# Altium PCB TB Power supply pcb.PcbDoc
Units mm, origin at the board's own origin, x right, y up, seen from the top; angles counter-clockwise.
Board outline 82 x 53 mm, 2 copper layers (Top Layer, Bottom Layer); 21 components, 8 nets, 58 pads, 67 vias.
Unrouted connection lines stored in the file: 9.
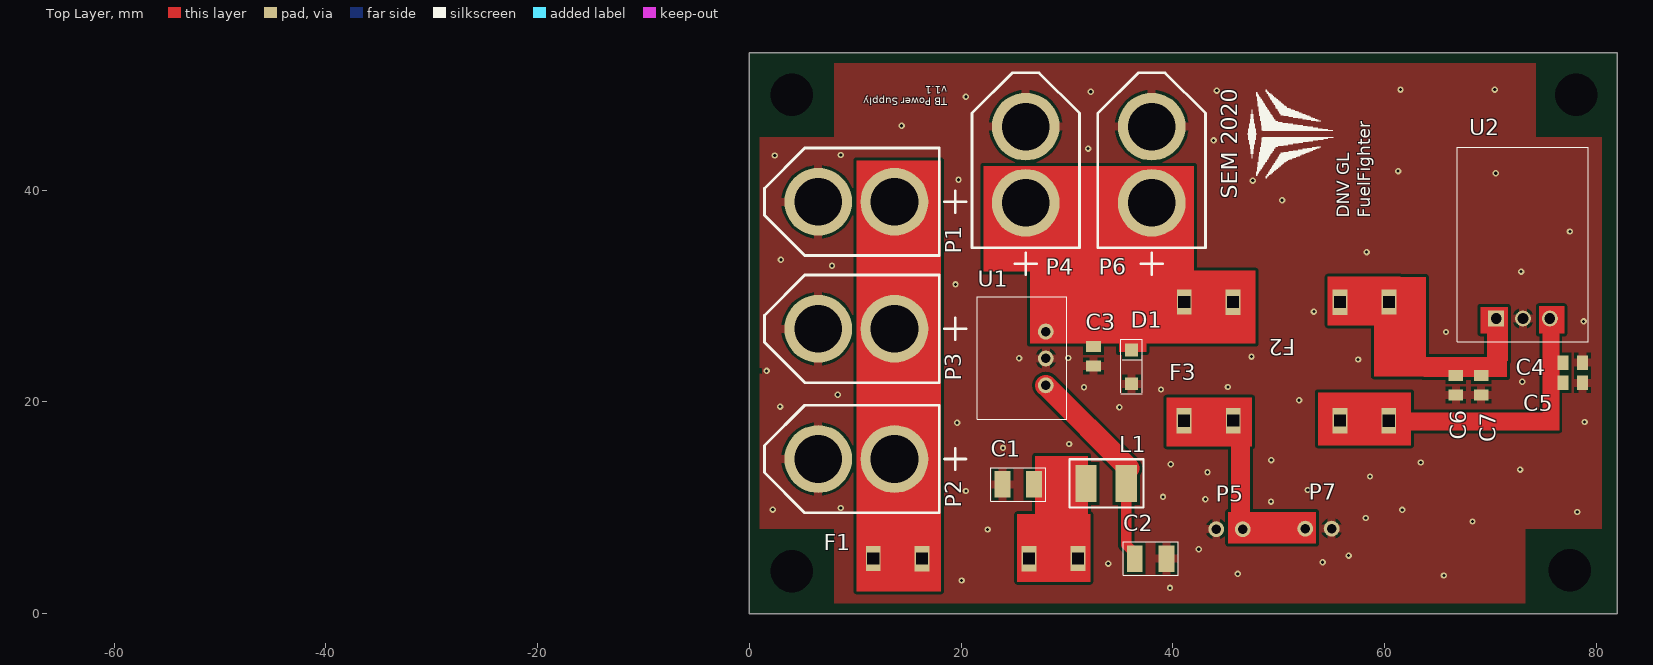
[diagram p0: Top Layer view]
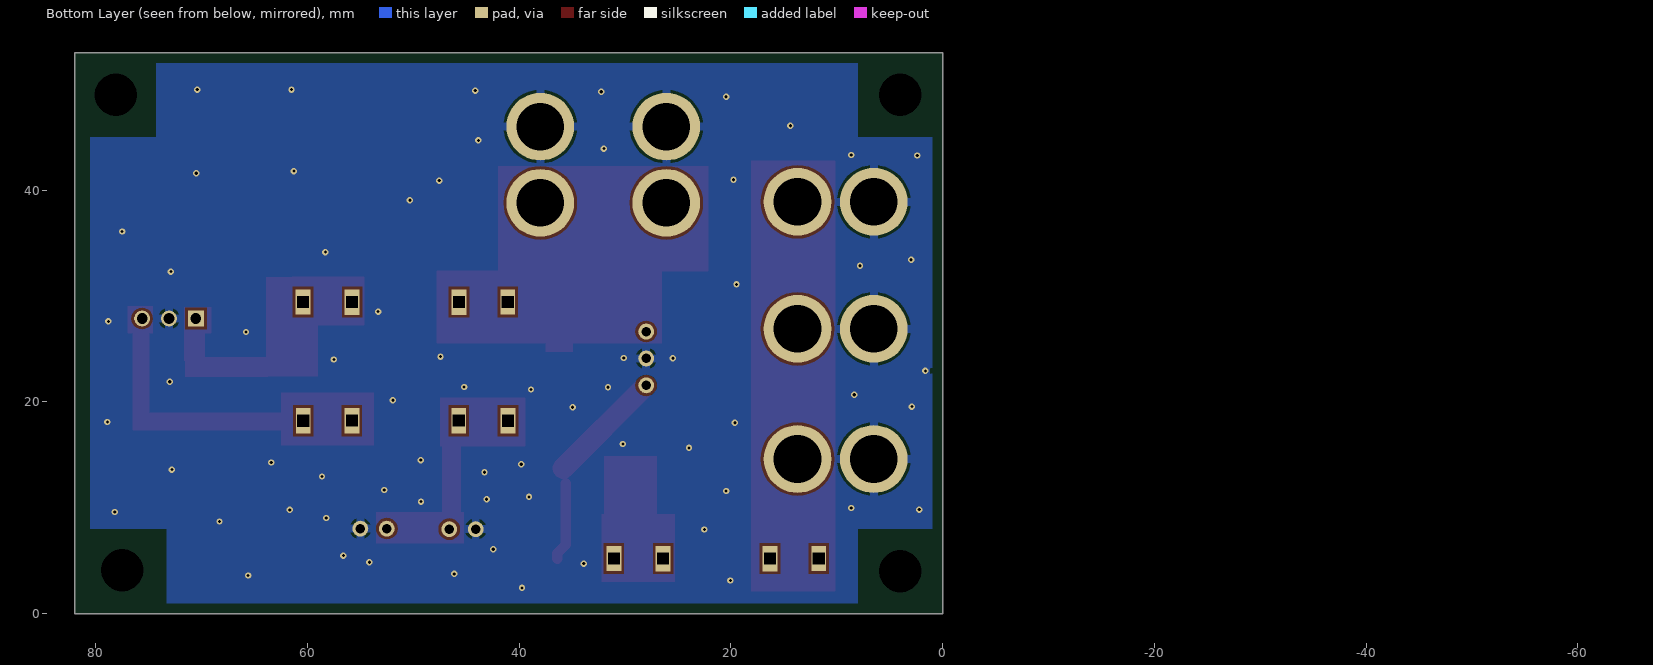
[diagram p1: Bottom Layer view, seen from below]

## Layer stack, top to bottom
Top Solder: solder mask 0.0102, Solder Resist, Dk 3.5
Top Layer: signal copper 0.0356
Dielectric 1: dielectric 0.32, FR-4, Dk 4.8
Bottom Layer: signal copper 0.0356
Bottom Solder: solder mask 0.0102, Solder Resist, Dk 3.5

## Board outline
0,53 0,0 82,0 82,53

## Design rules (kind name [scope] priority, off if disabled: settings)
Clearance [All] p1: gap=0.254 ignorepadtopadclearanceinfootprint=TRUE except(0: Arc-Text Track-Text SMDPad-Hole THPad-Hole Via-Hole Fill-Hole Poly-Hole Region-Hole Text-Text Text-Hole; 0.203: Arc-Arc Arc-Track Arc-SMDPad Arc-THPad Arc-Hole Track-Track Track-SMDPad Track-THPad Track-Hole SMDPad-SMDPad)
HoleSize [All] p1: absolutevalues=TRUE maxlimit=5 minlimit=0.025 maxpercent=80.000 minpercent=20.000
PlaneConnect [All] p1: planeconnectstyle=Relief reliefexpansion=0.508 reliefentries=4 reliefconductorwidth=0.5 reliefairgap=0.254
PolygonConnect [All] p1: connectstyle=Relief reliefconductorwidth=0.8 reliefentries=4 polygonreliefangle="90 Angle" airgapwidth=0.254
RoomDefinition "TB Power supply pcb" [InComponentClass('TB Power supply pcb')] p1: confinementstyle=ConfineIn formatcopy=TRUE lockcomponents=FALSE outline -2,-7.975 82.8,-7.975 82.8,54 -2,54
RoutingVias [All] p1: holewidth=0.711 width=1.27 viastyle="Through Hole" minholewidth=0.3 minwidth=0.6 maxholewidth=0.711 maxwidth=1.27
SolderMaskExpansion [All] p1: expansion=0.102 istentingtop=FALSE
Width [All] p1: maxlimit=4 minlimit=0.254 preferedwidth=0.4 minimp=50.000000 maximp=50.000000 favimp=50.000000
28 further rules are at their usual default settings.

## Components (designator, comment, footprint, x,y, rotation, side; value= is the part's Value field where it differs from the comment)
C1 "SMD" C_smd_3225 25.4,12.2 r180 top value="10 uF 63V"
C2 "SMD" C_smd_3225 37.9,5.2 r0 top value="10 uF 63V"
C3 "SMD" C_SMD_0805_pcb 32.5,24.3 r270 top value="10 uF 25V"
C4 "SMD" C_SMD_0805_pcb 77.775,23.7 r0 top value="10 uF 10V"
C5 "SMD" C_SMD_0805_pcb 77.775,21.8 r0 top value="10 uF 10V"
C6 "SMD" C_SMD_0805_pcb 66.725,21.575 r270 top value="10 uF 25V"
C7 "SMD" C_SMD_0805_pcb 69.125,21.575 r270 top value="10 uF 25V"
D1 "D_ZENER_smd_13V" D_ZENER_12V_smd 36.1,23.3 r90 top value="Zener 13V"
F1 "Fuse-holder-3A" fuse_holder_3A 32.55,2.325 r180 top value="1.5A Fuse"
F2 "Fuse-holder-3A" fuse_holder_3A 61.925,26.55 r180 top value="2A Fuse"
F3 "Fuse-holder-3A" fuse_holder_3A 39.55,21.1 r0 top
L1 "L_1.18A_4532" L_1.18A_4532 33.7,12.3 r0 top value="5.6 uH 1.18A"
P1 "XT-60" XT-60 6.5,38.9 r270 top
P2 "XT-60" XT-60 6.5,14.6 r270 top
P3 "XT-60" XT-60 6.5,26.9 r270 top
P4 "XT-60" XT-60 26.1,46 r180 top
P5 "JST_SE_2PIN" JST_SE_2PIN 44.1,7.975 r0 top
P6 "XT-60" XT-60 38,46 r180 top
P7 "JST_SE_2PIN" JST_SE_2PIN 52.5,8.025 r0 top
U1 "R-78C12-1.0" R-78C12-1.0 28,21.56 r180 top
U2 "OKI-78SR-5/1.5-W36HE-C" OKI-78SR-5/1.5-W36HE-C 70.535,27.875 r90 top

## Footprints (in the part's own frame and the unit in brackets; to place one, negate y for a bottom-side part, rotate by r counter-clockwise, add the part's x,y. Pads: shape width x height; smd on the part's side, far side on the other; paste and mask are expansions set on the pad)
C_SMD_0805_pcb [mm] "Chip Capacitor, 2-Leads, Body 2,00x1,25mm, IPC Medium Density"
  rect 1.05x1.4 smd: 1(-0.925,0) 2(0.925,0)
  body extent -1,-0.63 1,0.62, height 1.35
C_smd_3225 [mm]
  rect 1.5x2.5 smd: 1(-1.5,0) 2(1.5,0)
  silkscreen extent -2.6,-1.6 2.6,1.6, body extent -1.7,-1.2 1.9,1.2, height 2.5
D_ZENER_12V_smd [mm]
  rect 1.2x1.22 smd: A(-1.6,0) K(1.6,0)
  silkscreen extent -2.52,-1 2.6,1, body extent -1.6,-0.8 1.6,0.8, height 1.17
fuse_holder_3A [mm]
  rect 1.4x2.4 hole 1.1 square: 1(1.5,-2.88) 1(6.15,-2.875) 2(16.25,-2.875) 2(20.85,-2.88)
JST_SE_2PIN [mm]
  round 1.5 hole 0.9: 1(0,0) 2(2.5,0)
  body extent -2.45,-9.2 4.95,2.3, height 6.1
L_1.18A_4532 [mm]
  rect 2x3.5 smd: 1(-1.9,0) 2(1.9,0)
  silkscreen extent -3.47,-2.27 3.52,2.27, body extent -1.9,-2 1.9,2, height 2.6
OKI-78SR-5/1.5-W36HE-C [mm]
  rect 1.5x1.5 hole 1: 1(0,0)
  round 1.5 hole 1: 2(0,-2.54) 3(0,-5.08)
  round 1 on Top Overlay: ""(-1.2,2.6)
  round 1 on Mech13: ""(-1.2,2.6)
  silkscreen extent -2.2,-8.7 16.18,3.68, body extent -2.1,-8.6 16.1,5.8, height 10.7
R-78C12-1.0 [mm]
  round 1.5 hole 0.9: 1(0,0) 2(0,-2.54) 3(0,-5.08)
  round 1 on Top Overlay: ""(-1.05,2.225)
  round 1 on Mech13: ""(-1.05,2.225)
  silkscreen extent -2,-8.37 6.5,3.22, body extent -1.92,-8.27 6.4,3.15, height 10.4
XT-60 [mm]
  round 6.4 hole 4.5: 1(0,7.2) 2(0,0)
  silkscreen extent -5.08,-5.08 5.08,13.97, body extent -4.11,-4.41 4.02,11.52, height 15.5

## Part data
C1 C2: library part C_SMD_3225
C3 C4 C5 C6 C7: library part C_SMD_0805
F1 F2 F3: "(22.352mm x6.858mm)", ComponentLink1Description=datasheet, ComponentLink1URL=https://www.littelfuse.com/~/media/electronics/datasheets/fuse_clips/littelfuse_fuse_clip_111_datasheet.pdf.pdf
U1: "Wide input - 12V out buck"
U2: "12V-5V buck"
L1: Category=Inductor

## Free pads (board coordinates)
  round 0 hole 4: ""(4,4) ""(4,49) ""(77.5,4.1) ""(78.1,49)

## Via types
v1: diameter 0.6, hole 0.3, Top Layer to Bottom Layer, tented both sides, 67 vias

## Nets (pads, with @x,y where several pads share a name; then routed paths per layer and width w, separated by ;. In a path a pad name is that pad's centre, name@x,y a point inside that pad or via, vN(x,y) a via of type N, cw(c..) or ccw(c..) an arc to the next point about the centre after c; other vN are vias at no path point)
+5V: F3.1 P5.2 P7.1
+12V: C3.1 D1.K F2.2 P4.1 P6.1 U1.3
+36V: F1.2 P1.1 P2.1 P3.1
GND: C1.2 C2.2 C3.2 C4.2 C5.2 C6.2 C7.2 D1.A P1.2 P2.2 P3.2 P4.2 P5.1 P6.2 P7.2 U1.2 U2.2
  other v1: 39.725,2.425 20.05,3.125 65.6,3.6 46.125,3.75 33.9,4.725 54.15,4.85 56.6,5.475 42.45,6.075 22.5,7.95 68.3,8.7 58.225,9.025 78.2,9.6 61.675,9.8 2.2,9.825 8.625,9.975 49.275,10.575 43.075,10.8 39.075,11.025 20.45,11.575 52.75,11.675 58.625,12.95 43.275,13.35 72.8,13.6 39.8,14.1 63.425,14.275 49.3,14.5 23.95,15.65 30.2,16.025 19.625,18.025 78.9,18.1 34.95,19.5 2.9,19.55 51.925,20.15 8.35,20.675 38.875,21.175 31.6,21.375 45.2,21.4 73,21.9 1.625,22.925 57.5,24 25.475,24.125 30.125,24.15 47.425,24.275 65.8,26.6 78.8,27.6 53.325,28.525 19.475,31.1 72.9,32.3 7.8,32.85 2.975,33.425 58.3,34.15 77.5,36.1 50.325,39.05 47.55,40.9 19.75,40.975 70.5,41.6 61.275,41.8 2.4,43.275 8.625,43.325 32,43.925 43.85,44.7 14.375,46.075 20.45,48.825 32.25,49.3 44.15,49.4 61.5,49.5 70.4,49.5
NetC1_1: C1.1 F1.1 L1.1
NetC4_1: C4.1 C5.1 F3.2 U2.3
Vin12V: C6.1 C7.1 F2.1 U2.1
Vin36V: C2.1 L1.2 U1.1 | length 18.5
  Top Layer w1: L1.2 35.6,6.5 36.4,5.7 C2.1
  Top Layer w2: U1.1 L1.2@35.83,13.73
pads on no net: U1. U2.

## Polygon pours and split planes (outlines as drawn)
GND on Bottom Layer "Bottom Layer-GND" (solid, pour order 14): 1,45 8,45 8,52 74.3,52 74.3,45 80.5,45 80.5,8 73.3,8 73.3,1 8,1 8,8 1,8
GND on Top Layer "Top Layer-GND" (solid, pour order 16): 73.3,1 73.3,8 80.5,8 80.5,45 74.3,45 74.3,52 8,52 8,45 1,45 1,8 8,8 8,1

## Other copper
Top Layer:
  rectangle net Vin12V: 59,22.4 63.9,31.8
  rectangle net NetC4_1: 61.9,17.3 76.5,19
  rectangle net NetC4_1: 53.7,15.9 62.5,20.9
  rectangle net +5V: 45.5,9.2 47.3,16.1
  rectangle net +5V: 39.4,15.8 47.5,20.4
  rectangle net NetC4_1: 74.9,18 76.5,26.8
  rectangle net Vin12V: 69.675,23.85 71.675,27.65
  rectangle net Vin12V: 63.675,22.35 71.575,24.25
  rectangle net Vin12V: 69.05,26.475 71.65,28.975
  region net Vin12V: 61.525,27.225 61.525,31.825 54.625,31.825 54.625,27.225
  rectangle net +5V: 45.225,6.6 53.525,9.6
  rectangle net NetC4_1: 74.578,26.447 76.978,29.047
  rectangle net +12V: 34.9,24.7 37.5,25.9
  rectangle net +12V: 26.5,25.5 47.825,32.4
  rectangle net +12V: 22.1,32.3 42,42.3
  rectangle net NetC1_1: 25.3,3 32.2,9.4
  rectangle net NetC1_1: 27,9.2 32,14.9
  rectangle net +36V: 10.1,2.1 18.1,42.8
  region: -15.7,43.375
  region: -15.7,43.375
  region: -11.3,44.8
  region: -63.75,29.5

## Silkscreen, mask and mechanical layers (free items; w line width, h text height)
Top Overlay:
  drawing of 5 lines, arcs and shapes, not listed
  text "TB Power Supply / v1.1" at 18.7,49.8 h0.7 r180
  text "SEM 2020" at 46.075,39.2 h1.52 r90
  text "DNV GL / FuelFighter" at 59.075,37.4 h2 r90
Mechanical 1:
  lines w0.254: 0.25,0.25 81.6,0.25 81.6,52.825 0.25,52.825 0.25,0.25